# EAGLE board VCO3340 v2.1 (EAGLE 9.5.2)
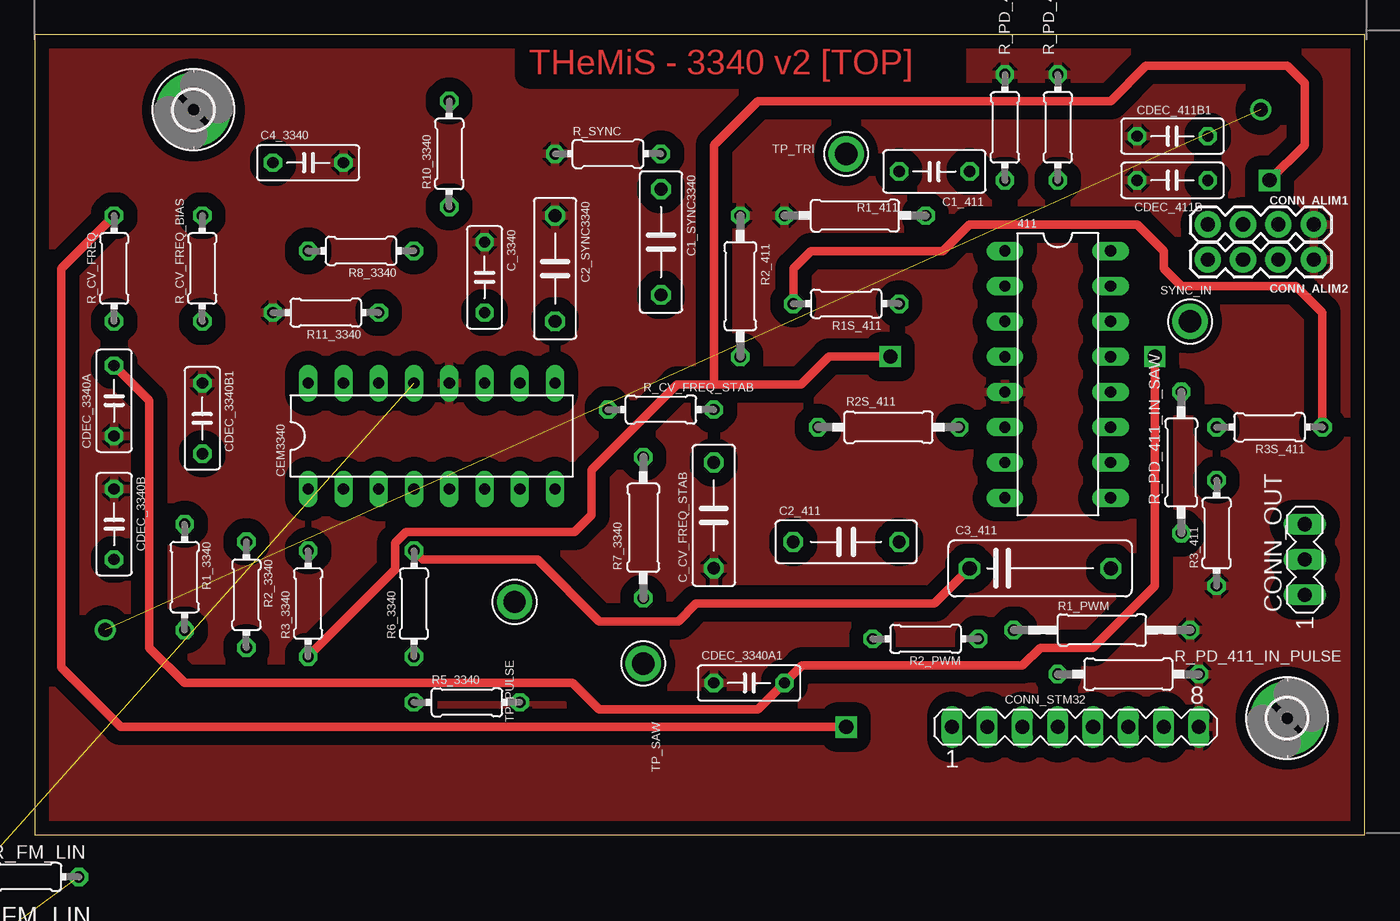
[diagram p0: board, top side]
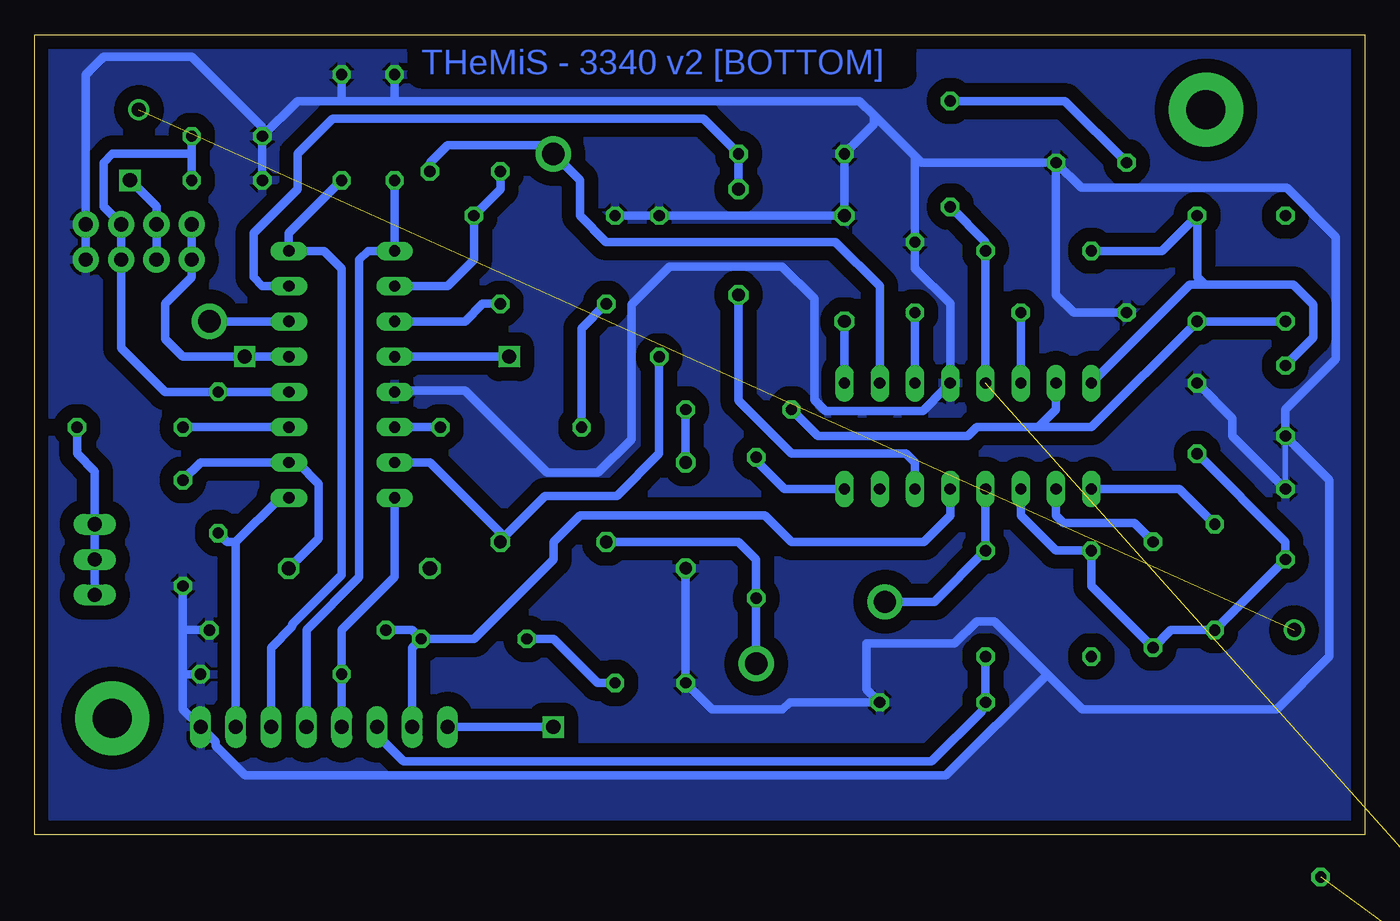
[diagram p1: board, bottom side, seen from below]

Size 95.76 x 57.6 mm. Coordinates in mm from the lower left corner, seen from the top.
Outline: 0,0 95.76,0 95.76,57.6 0,57.6 0,0
Copper layers (1*16): Top 0.035mm / dielectric 1.5mm / Bottom 0.035mm
Design rules "default *": minimum track width 0.4mm, minimum drill 0.35mm, track to track 0.4mm, track to pad 0.4mm, pad to pad 0.4mm, via to via 0.4mm, smd to smd 0.4mm, copper to edge 40mil, drill to drill 6mil, minimum pad ring 10mil, minimum via ring 8mil, stop-mask expansion 4mil, vias tented up to drill 0mil, thermal gap 10mil

## Footprints (pad centres in the part's own frame; a part is rotated, then mirrored left to right if it is on the bottom)
DIL16 = drill 0.813 long: 1 -8.89,-3.81; 2 -6.35,-3.81; 3 -3.81,-3.81; 4 -1.27,-3.81; 5 1.27,-3.81; 6 3.81,-3.81; 7 6.35,-3.81; 8 8.89,-3.81; 9 8.89,3.81; 10 6.35,3.81; 11 3.81,3.81; 12 1.27,3.81; 13 -1.27,3.81; 14 -3.81,3.81; 15 -6.35,3.81; 16 -8.89,3.81
C050-030X075 = drill 0.813 octagon: 1 -2.54,0; 2 2.54,0
C075-032X103 = drill 0.914 octagon: 1 -3.81,0; 2 3.81,0
C102-043X133 = drill 1.016 octagon: 1 -5.08,0; 2 5.08,0
C050-025X075 = drill 0.813 octagon: 1 -2.54,0; 2 2.54,0
1X04 = drill 1.016 pad 1.88: 1 0,0; 2 2.54,0; 3 5.08,0; 4 7.62,0
MA03-1 = drill 1.016 long: 1 -2.54,0; 2 0,0; 3 2.54,0
MA08-1 = drill 1.016 long: 1 -8.89,0; 2 -6.35,0; 3 -3.81,0; 4 -1.27,0; 5 1.27,0; 6 3.81,0; 7 6.35,0; 8 8.89,0
2,8-PAD = drill 2.8 pad 5.334: B2,8 0,0
0207/10 = drill 0.813 octagon: 1 -5.08,0; 2 5.08,0
0204/7 = drill 0.813 octagon: 1 -3.81,0; 2 3.81,0
0207/12 = drill 0.813 octagon: 1 -6.35,0; 2 6.35,0
TESTPOINT_63 = drill 1.6 pad 2.54: P$1 0,0

## Placement (x,y rotation side)
411  ADG411N  [DIL16]  73.66,33.15 270 top
C1_411  470n  [C050-030X075]  64.77,47.75 180 top
C1_SYNC3340  1n  [C075-032X103]  45.09,42.67 270 top
C2_411  470n  [C075-032X103]  58.42,21.08 0 top
C2_SYNC3340  100n  [C075-032X103]  37.46,40.77 270 top
C3_411  470n  [C102-043X133]  72.39,19.18 0 top
C4_3340  10n  [C050-025X075]  19.69,48.39 0 top
C_3340  1n  [C050-025X075]  32.38,40.13 270 top
C_CV_FREQ_STAB  10n  [C075-032X103]  48.89,22.99 90 top
C_FM_LIN  100n  [C050-025X075]  -1.27,-8.13 0 top  (outside the outline)
CDEC_411B  100n  [C050-025X075]  81.92,47.12 180 top
CDEC_411B1  10u  [C050-025X075]  81.92,50.29 180 top
CDEC_3340A  100n  [C050-025X075]  5.71,31.24 90 top
CDEC_3340A1  10u  [C050-025X075]  51.43,10.92 0 top
CDEC_3340B  100n  [C050-025X075]  5.71,22.35 270 top
CDEC_3340B1  10u  [C050-025X075]  12.06,29.97 270 top
CEM3340  CEM3340  [DIL16]  28.58,28.7 0 top
CONN_ALIM1  [1X04]  84.45,43.94 0 top
CONN_ALIM2  [1X04]  84.45,41.4 0 top
CONN_OUT  [MA03-1]  91.44,19.81 90 top
CONN_STM32  [MA08-1]  74.93,7.75 0 top
H1  MOUNT-PAD-ROUND2.8  [2,8-PAD]  90.17,8.38 0 top
H2  MOUNT-PAD-ROUND2.8  [2,8-PAD]  11.43,52.2 0 top
R1_411  100k  [0207/10]  59.05,44.58 0 top
R1_3340  30k  [0204/7]  10.79,18.54 270 top
R1_PWM  68k  [0207/12]  76.84,14.73 0 top
R1S_411  1k  [0204/7]  58.42,38.23 180 top
R2_411  100k  [0207/10]  50.8,39.5 270 top
R2_3340  5.6k  [0204/7]  15.24,17.27 270 top
R2_PWM  330k  [0204/7]  64.14,14.1 180 top
R2S_411  1k  [0207/10]  61.47,29.34 0 top
R3_411  100k  [0204/7]  85.09,21.72 90 top
R3_3340  820  [0204/7]  19.69,16.64 90 top
R3S_411  1k  [0204/7]  88.9,29.34 180 top
R5_3340  10k  [0204/7]  31.12,9.52 0 top
R6_3340  33k  [0204/7]  27.31,16.64 90 top
R7_3340  5.6k  [0207/10]  43.81,22.1 90 top
R8_3340  1.5M  [0204/7]  23.5,42.04 180 top
R10_3340  470  [0204/7]  29.85,49.02 90 top
R11_3340  1.8k  [0204/7]  20.96,37.59 180 top
R_CV_FREQ  68k  [0204/7]  5.71,40.77 90 top
R_CV_FREQ_BIAS  270k  [0204/7]  12.06,40.77 90 top
R_CV_FREQ_STAB  470  [0204/7]  45.09,30.61 0 top
R_FM_LIN  1M  [0204/7]  -0.64,-3.05 0 top  (outside the outline)
R_PD_411_IN_PULSE  100k  [0207/10]  78.74,11.56 180 top
R_PD_411_IN_SAW  100k  [0207/10]  82.55,26.8 90 top
R_PD_411_IN_SYNC  100k  [0204/7]  73.66,50.93 90 top
R_PD_411_IN_TRI  100k  [0204/7]  69.85,50.93 90 top
R_SYNC  470k  [0204/7]  41.27,49.02 0 top
SYNC_IN  [TESTPOINT_63]  83.19,36.96 0 top
TP_PULSE  [TESTPOINT_63]  34.54,16.76 270 top
TP_SAW  [TESTPOINT_63]  43.81,12.32 270 top
TP_TRI  [TESTPOINT_63]  58.42,49.02 180 top

## Library data of the parts
411 = analog-devices; MF: ALTERA CORPORATION; MPN: ADG411BN; OC_FARNELL: 1424317; OC_NEWARK: 05F6198
C1_411 C1_SYNC3340 C2_411 C2_SYNC3340 C3_411 C4_3340 C_3340 C_CV_FREQ_STAB C_FM_LIN CDEC_411B CDEC_411B1 CDEC_3340A CDEC_3340A1 CDEC_3340B CDEC_3340B1 = rcl; SPICEPREFIX: C
CEM3340 = analog-audio-chips
CONN_ALIM1 CONN_ALIM2 = SparkFun-Connectors; PROD_ID: CONN-09696
CONN_OUT CONN_STM32 = con-lstb; OC_FARNELL: unknown; OC_NEWARK: unknown
H1 H2 = holes
R1_411 R1_3340 R1_PWM R1S_411 R2_411 R2_3340 R2_PWM R2S_411 R3_411 R3_3340 R3S_411 R5_3340 R6_3340 R7_3340 R8_3340 R10_3340 R11_3340 R_CV_FREQ R_CV_FREQ_BIAS R_CV_FREQ_STAB R_FM_LIN R_PD_411_IN_PULSE R_PD_411_IN_SAW R_PD_411_IN_SYNC R_PD_411_IN_TRI R_SYNC = rcl; SPICEPREFIX: R
SYNC_IN TP_PULSE TP_SAW TP_TRI = 6P1_EVB

## Nets
5V: 411.12 CDEC_411B1.1 CDEC_411B.1 CONN_ALIM1.3 CONN_ALIM2.3 R_PD_411_IN_SAW.2
411_IN_PULSE: 411.8 CONN_STM32.4 R_PD_411_IN_PULSE.2
411_IN_SAW: 411.9 CONN_STM32.7 R_PD_411_IN_SAW.1
411_IN_SYNC: 411.16 CONN_STM32.6 R_PD_411_IN_SYNC.1
411_IN_TRI: 411.1 CONN_STM32.5 R_PD_411_IN_TRI.1
+15V: 411.13 CDEC_3340A1.2 CDEC_3340A.2 CEM3340.16 CONN_ALIM1.1 CONN_ALIM2.1 R2_PWM.2 R8_3340.2 R_CV_FREQ_BIAS.2
-15V: 411.4 CONN_ALIM1.2 CONN_ALIM2.2 R3_3340.1
AGND: 411.5 C2_SYNC3340.1 C4_3340.2 C_3340.1 C_CV_FREQ_STAB.1 CDEC_411B1.2 CDEC_411B.2 CDEC_3340A1.1 CDEC_3340A.1 CDEC_3340B1.1 CDEC_3340B.1 CEM3340.12 CONN_ALIM1.4 CONN_ALIM2.4 CONN_STM32.8 R1_411.1 R1_PWM.2 R2_411.1 R3_411.1 R5_3340.2 R11_3340.2 R_PD_411_IN_PULSE.1 R_PD_411_IN_SYNC.2 R_PD_411_IN_TRI.2 R_SYNC.1
CALIB: CONN_STM32.3 R5_3340.1 R6_3340.1
CV_FREQ: CONN_STM32.1 R_CV_FREQ.2
CV_PWM: CEM3340.5 CONN_STM32.2 R1_PWM.1 R2_PWM.1
FREQ_CTRL: CEM3340.15 R_CV_FREQ.1 R_CV_FREQ_BIAS.1 R_CV_FREQ_STAB.1
HARD_SYNC: C1_SYNC3340.2 CEM3340.6
LINEAR_CTRL: CEM3340.13 R8_3340.1 R10_3340.1 R_FM_LIN.1
N$1: C_FM_LIN.1 R_FM_LIN.2
N$2: 411.6 R2S_411.2
N$4: C_FM_LIN.2
N$42: C_CV_FREQ_STAB.2 R_CV_FREQ_STAB.2
N$45: C4_3340.1 R10_3340.2
N$49: 411.2 C1_411.2 R1_411.2
N$50: 411.7 C2_411.2 R2_411.2
N$51: 411.10 C3_411.2 R3_411.2
OUT: CONN_OUT.1 CONN_OUT.2 CONN_OUT.3 R1S_411.2 R2S_411.1 R3S_411.1
PULSE: C3_411.1 CEM3340.4 R6_3340.2 TP_PULSE.P$1
PULSE_OUT: 411.11 R3S_411.2
SAW: CEM3340.8 R7_3340.2
SAW_3340: C2_411.1 R7_3340.1 TP_SAW.P$1
SCALE: CEM3340.14 R11_3340.1
SOFT_SYNC: C2_SYNC3340.2 CEM3340.9
SYNC_3340: 411.15 C1_SYNC3340.1 R_SYNC.2
SYNC_IN: 411.14 SYNC_IN.P$1
TEMPCO1: CEM3340.1 R1_3340.1
TEMPCO2: CEM3340.2 R2_3340.1
TIMING_CAP: C_3340.2 CEM3340.11
TRI_3340: C1_411.1 CEM3340.10 TP_TRI.P$1
TRI_OUT: 411.3 R1S_411.1
VEE: CDEC_3340B1.2 CDEC_3340B.2 CEM3340.3 R1_3340.2 R2_3340.2 R3_3340.2

## Tracks (layer width: path | path; a pad name or v marks a point on that pad's centre or on a via)
5V
  Bottom 0.61: 411.12 79.38,31.88 R_PD_411_IN_SAW.2 86.36,31.88 89.54,35.05 CONN_ALIM2.3 CONN_ALIM1.3 90.81,45.21 90.81,48.39 90.17,49.02 84.45,49.02 | CDEC_411B1.1 84.45,49.02 | 84.45,49.02 CDEC_411B.1
411_IN_PULSE
  Bottom 0.61: 411.8 69.85,18.54 73.66,14.73 R_PD_411_IN_PULSE.2 73.66,9.65 CONN_STM32.4
411_IN_SAW
  Bottom 0.61: 81.28,21.08 78.11,24.26 411.9 | 81.28,21.08 CONN_STM32.7 | R_PD_411_IN_SAW.1 81.92,21.08 81.28,21.08
411_IN_SYNC
  Bottom 0.61: CONN_STM32.6 78.74,13.46 77.21,14.99 77.21,15.15 73.66,18.7 73.66,40.77 74.93,42.04 411.16 77.47,43.31 R_PD_411_IN_SYNC.1
411_IN_TRI
  Bottom 0.61: CONN_STM32.5 76.2,14.73 72.39,18.54 72.39,41.4 71.76,42.04 411.1 R_PD_411_IN_TRI.1
+15V  (via drill 1.02)
  Top 0.61: v80.65,34.42 80.65,17.91 76.2,13.46 72.39,13.46 71.12,12.19 55.24,12.19 CDEC_3340A1.2 52.07,9.02 40.64,9.02 38.73,10.92 10.79,10.92 8.26,13.46 8.26,31.24 CDEC_3340A.2
  Bottom 0.61: CONN_ALIM1.1 CONN_ALIM2.1 84.45,40.13 86.36,38.23 86.36,35.69 85.09,34.42 v80.65,34.42 411.13 | 11.53,39.59 12.06,40.13 R_CV_FREQ_BIAS.2 14.61,42.04 R8_3340.2 | 11.53,39.59 5.15,39.59 3.71,38.16 3.71,35.78 CDEC_3340A.2 | R2_PWM.2 58.42,14.1 55.24,10.92 CDEC_3340A1.2 | CEM3340.16 12.61,39.59 11.53,39.59
-15V  (via drill 1.02)
  Top 0.61: v61.59,34.42 57.18,34.42 55.17,32.42 48.89,32.42 | R3_3340.1 25.94,19.08 25.94,21.01 26.74,21.81 38.88,21.81 40.1,23.03 40.1,26.26 46.26,32.42 48.89,32.42 | 48.89,32.42 48.89,49.66 52.07,52.83 77.47,52.83 80.01,55.37 90.17,55.37 91.44,54.1 91.44,49.66 v88.9,47.12
  Bottom 0.61: CONN_ALIM2.2 CONN_ALIM1.2 87,45.21 v88.9,47.12 | 411.4 v61.59,34.42
AGND
  Bottom 0.4: CDEC_3340B.1 CDEC_3340A.1
  Bottom 0.61: CONN_ALIM2.4 CONN_ALIM1.4 92.08,54.74 90.81,56.01 84.45,56.01 79.38,50.93 CDEC_411B1.2 | CDEC_411B1.2 CDEC_411B.2 | C_CV_FREQ_STAB.1 CDEC_3340A1.1 46.99,9.02 41.91,9.02 41.4,9.52 R5_3340.2 35.88,10.48 35.88,13.78 29.53,13.78 27.94,15.37 26.67,15.37 22.86,11.56 | C4_3340.2 31.92,48.39 32.38,48.85 | 32.38,48.85 35.33,51.79 | 35.33,51.79 36.37,52.83 69.85,52.83 | CDEC_411B1.2 76.84,52.83 73.66,52.83 | 73.66,52.83 69.85,52.83 | C4_3340.2 20.42,46.58 5.63,46.58 2.07,43.02 2.07,34.25 5.71,30.61 CDEC_3340A.1 2.54,25.53 2.54,12.83 6.35,9.02 20.32,9.02 22.86,11.56 | R11_3340.2 20.96,37.59 22.23,38.86 C4_3340.2 | R1_411.1 R2_411.1 C2_SYNC3340.1 R_SYNC.1 35.33,51.16 35.33,51.79 | 32.38,48.85 C_3340.1 32.38,40.77 29.85,38.23 CEM3340.12 31.02,31.34 31.02,31.29 31.82,30.49 38.83,30.49 39.63,31.29 39.63,38.59 41.96,40.91 50.04,40.91 52.8,38.16 52.8,28.45 55.19,26.07 58.86,26.07 64.76,31.97 69.76,31.97 411.5 | R3_411.1 85.09,14.73 | 85.09,14.73 85.09,11.56 | 85.09,11.56 85.09,9.02 CONN_STM32.8 82.75,6.67 82.75,6.38 80.62,4.25 30.16,4.25 22.86,11.56 | CDEC_3340B1.1 9.53,29.97 9.53,28.7 CDEC_3340B.1 | R_PD_411_IN_PULSE.1 85.09,11.56 | R1_PWM.2 85.09,14.73 | R_PD_411_IN_TRI.2 69.85,52.83 | R_PD_411_IN_SYNC.2 73.66,52.83
  pour Top (isolate 1.016): 0,57.28 95.89,57.28 95.89,0.13 0,0.13
  pour Bottom (isolate 1.016): 0,57.91 95.89,57.91 95.89,0.13 0,0.13
CALIB
  Bottom 0.61: R6_3340.1 R5_3340.1 27.56,8.89 31.19,5.26 69.22,5.26 71.12,7.17 CONN_STM32.3
CV_FREQ  (via drill 1.02)
  Top 0.61: v58.42,7.75 6.19,7.75 1.91,12.03 1.91,40.77 R_CV_FREQ.2
  Bottom 0.61: CONN_STM32.1 v58.42,7.75
CV_PWM
  Bottom 0.61: CEM3340.5 29.85,22.99 31.75,21.08 41.27,21.08 43.18,22.99 56.52,22.99 58.42,21.08 58.42,19.81 64.14,14.1 R2_PWM.1 | R1_PWM.1 68.58,14.73 R2_PWM.1 | R2_PWM.1 68.58,13.46 CONN_STM32.2
FREQ_CTRL
  Bottom 0.61: R_CV_FREQ.1 R_CV_FREQ_BIAS.1 19.69,29.34 23.5,29.34 | CEM3340.15 22.23,30.61 23.5,29.34 | 23.5,29.34 27.94,29.34 28.58,28.7 39.37,28.7 R_CV_FREQ_STAB.1
HARD_SYNC
  Bottom 0.61: C1_SYNC3340.2 45.09,31.24 41.27,27.43 33.02,27.43 32.38,26.8 CEM3340.6
LINEAR_CTRL  (1 unrouted)
  Bottom 0.61: R10_3340.1 27.31,42.67 R8_3340.1 CEM3340.13
N$1  (1 unrouted)
N$2
  Bottom 0.61: 411.6 R2S_411.2
N$3  (via drill 1.02)  (1 unrouted)
  other vias: 5.08,14.73 88.27,52.2
N$42
  Bottom 0.61: R_CV_FREQ_STAB.2 C_CV_FREQ_STAB.2
N$45
  Bottom 0.61: R10_3340.2 21.59,52.83 C4_3340.1
N$49
  Bottom 0.61: 411.2 66.04,39.5 64.14,41.4 R1_411.2 62.23,46.48 C1_411.2
N$50
  Bottom 0.61: 411.7 67.31,26.8 62.23,21.72 C2_411.2 62.23,21.18 59.01,24.4 53.83,24.4 50.8,27.43 R2_411.2
N$51
  Bottom 0.61: C3_411.2 75.31,21.34 75.31,25.27 76.84,26.8 411.10 83.82,26.8 R3_411.2
OUT
  Top 0.61: R1S_411.2 54.61,40.77 55.88,42.04 65.41,42.04 67.31,43.94 79.38,43.94 81.28,42.04 81.28,40.77 82.55,39.5 90.81,39.5 92.71,37.59 R3S_411.1
  Bottom 0.61: R1S_411.2 56.39,36.45 R2S_411.1 | R3S_411.1 92.71,27.43 91.44,26.16 CONN_OUT.3 CONN_OUT.2 CONN_OUT.1
PULSE
  Top 0.61: C3_411.1 64.77,16.64 47.62,16.64 46.35,15.37 40.64,15.37 36.2,19.81 27.94,19.81 R6_3340.2
  Bottom 0.61: CEM3340.4 R6_3340.2 30.99,16.76 TP_PULSE.P$1
PULSE_OUT
  Bottom 0.61: 411.11 R3S_411.2
SAW
  Bottom 0.61: R7_3340.2 43.81,26.92 41.78,24.89 CEM3340.8
SAW_3340
  Bottom 0.61: TP_SAW.P$1 43.81,16.64 R7_3340.1 43.81,19.81 45.09,21.08 C2_411.1
SCALE
  Bottom 0.61: CEM3340.14 R11_3340.1
SOFT_SYNC
  Bottom 0.61: C2_SYNC3340.2 CEM3340.9
SYNC_3340
  Bottom 0.61: 411.15 79.38,39.5 80.01,40.13 80.01,43.31 76.84,46.48 76.84,49.02 74.3,51.56 47.62,51.56 R_SYNC.2 C1_SYNC3340.1
SYNC_IN
  Bottom 0.61: SYNC_IN.P$1 411.14
TEMPCO1
  Bottom 0.61: CEM3340.1 13.33,24.89 R1_3340.1
TEMPCO2
  Bottom 0.61: CEM3340.2 22.23,22.99 21.69,22.45 16.61,22.45 R2_3340.1
TIMING_CAP
  Bottom 0.61: CEM3340.11 C_3340.2
TRI_3340
  Bottom 0.61: CEM3340.10 34.92,39.5 38.1,42.67 54.61,42.67 56.52,44.58 56.52,47.12 TP_TRI.P$1 59.05,49.66 66.04,49.66 67.31,48.39 C1_411.1
TRI_OUT
  Bottom 0.61: 411.3 64.77,36.96 63.5,38.23 R1S_411.1
VEE
  Bottom 0.61: CEM3340.3 24.77,22.99 22.23,20.45 R3_3340.2 19.69,17.91 R2_3340.2 13.97,14.73 R1_3340.2 CDEC_3340B.2 5.71,21.08 CDEC_3340B1.2

## Text on the board
Top: THeMiS - 3340 v2 [TOP]
Bottom: THeMiS - 3340 v2 [BOTTOM]
tDocu: VCO3340